# Altium PCB 7000D-5ch.PcbDoc
Units mm, origin at the board's own origin, x right, y up, seen from the top; angles counter-clockwise.
Board outline 69.85 x 45.21 mm, 4 copper layers (Top Layer, GND, PWR, Bottom Layer), stack 0.603 mm thick; 56 components, 42 nets, 190 pads, 92 vias.
Unrouted connection lines stored in the file: 86.
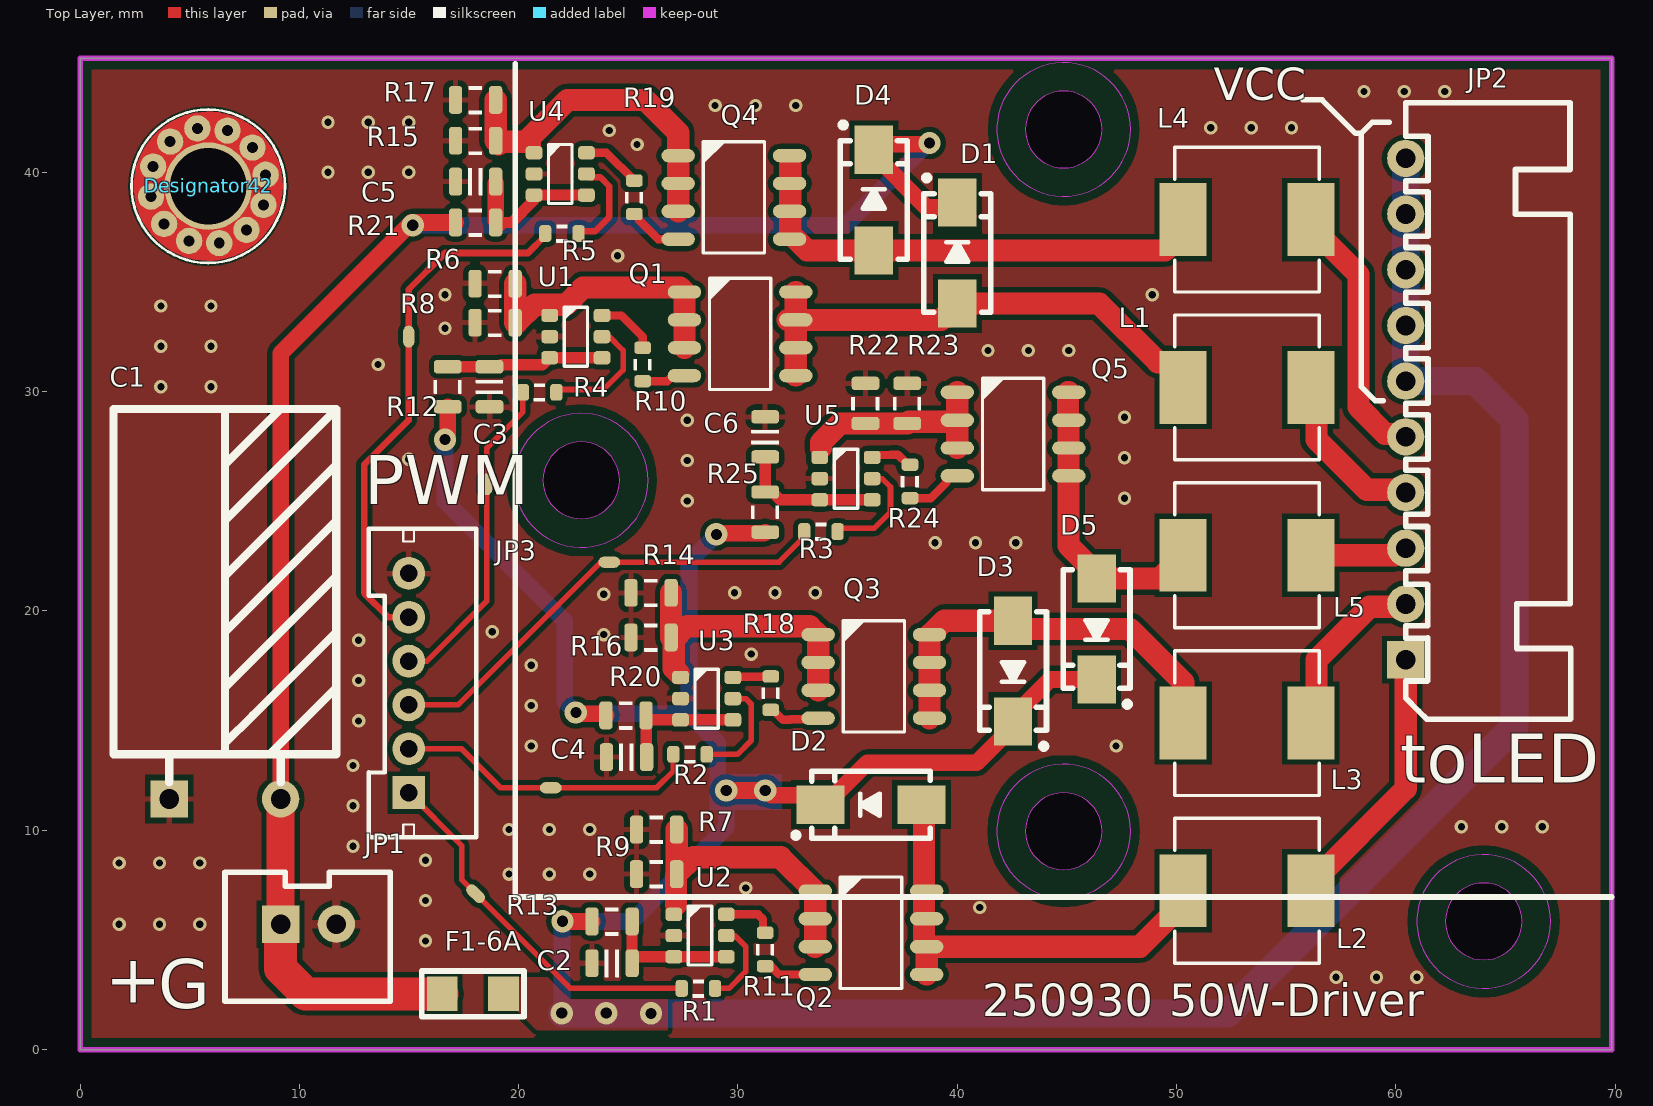
[diagram p0: Top Layer view]
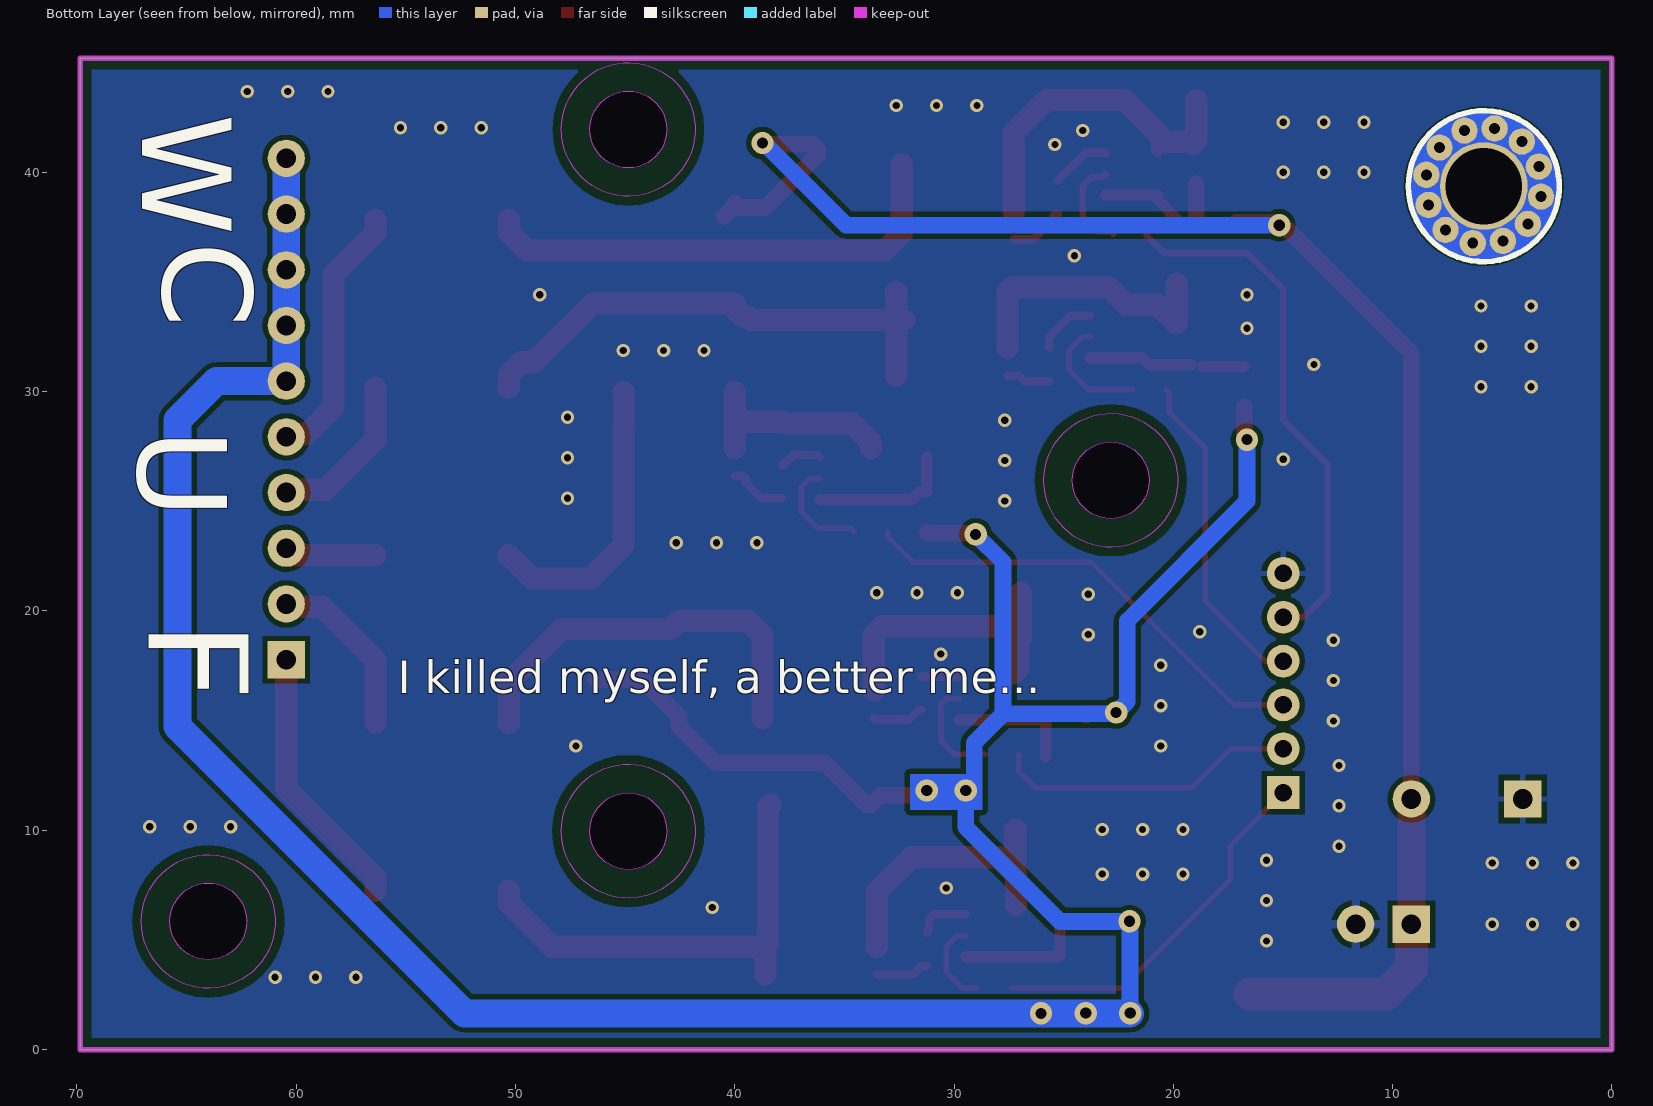
[diagram p1: Bottom Layer view, seen from below]
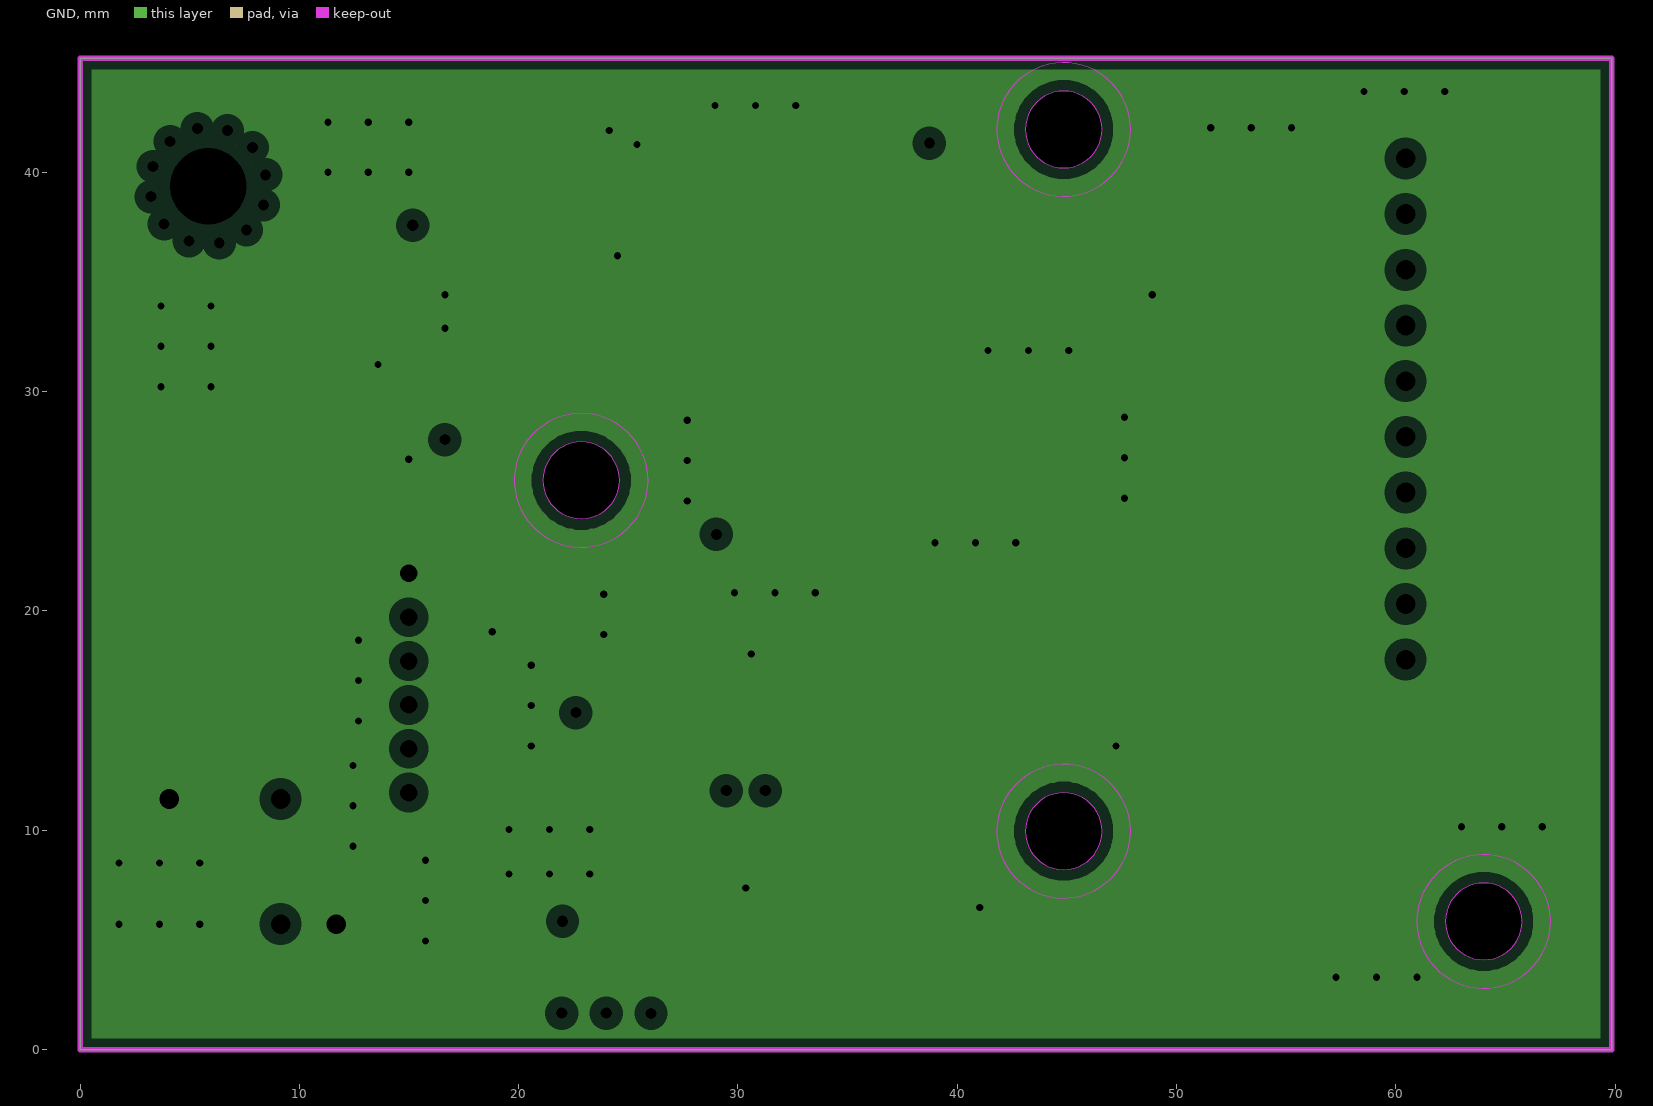
[diagram p2: GND, clearances drawn from the general rule]
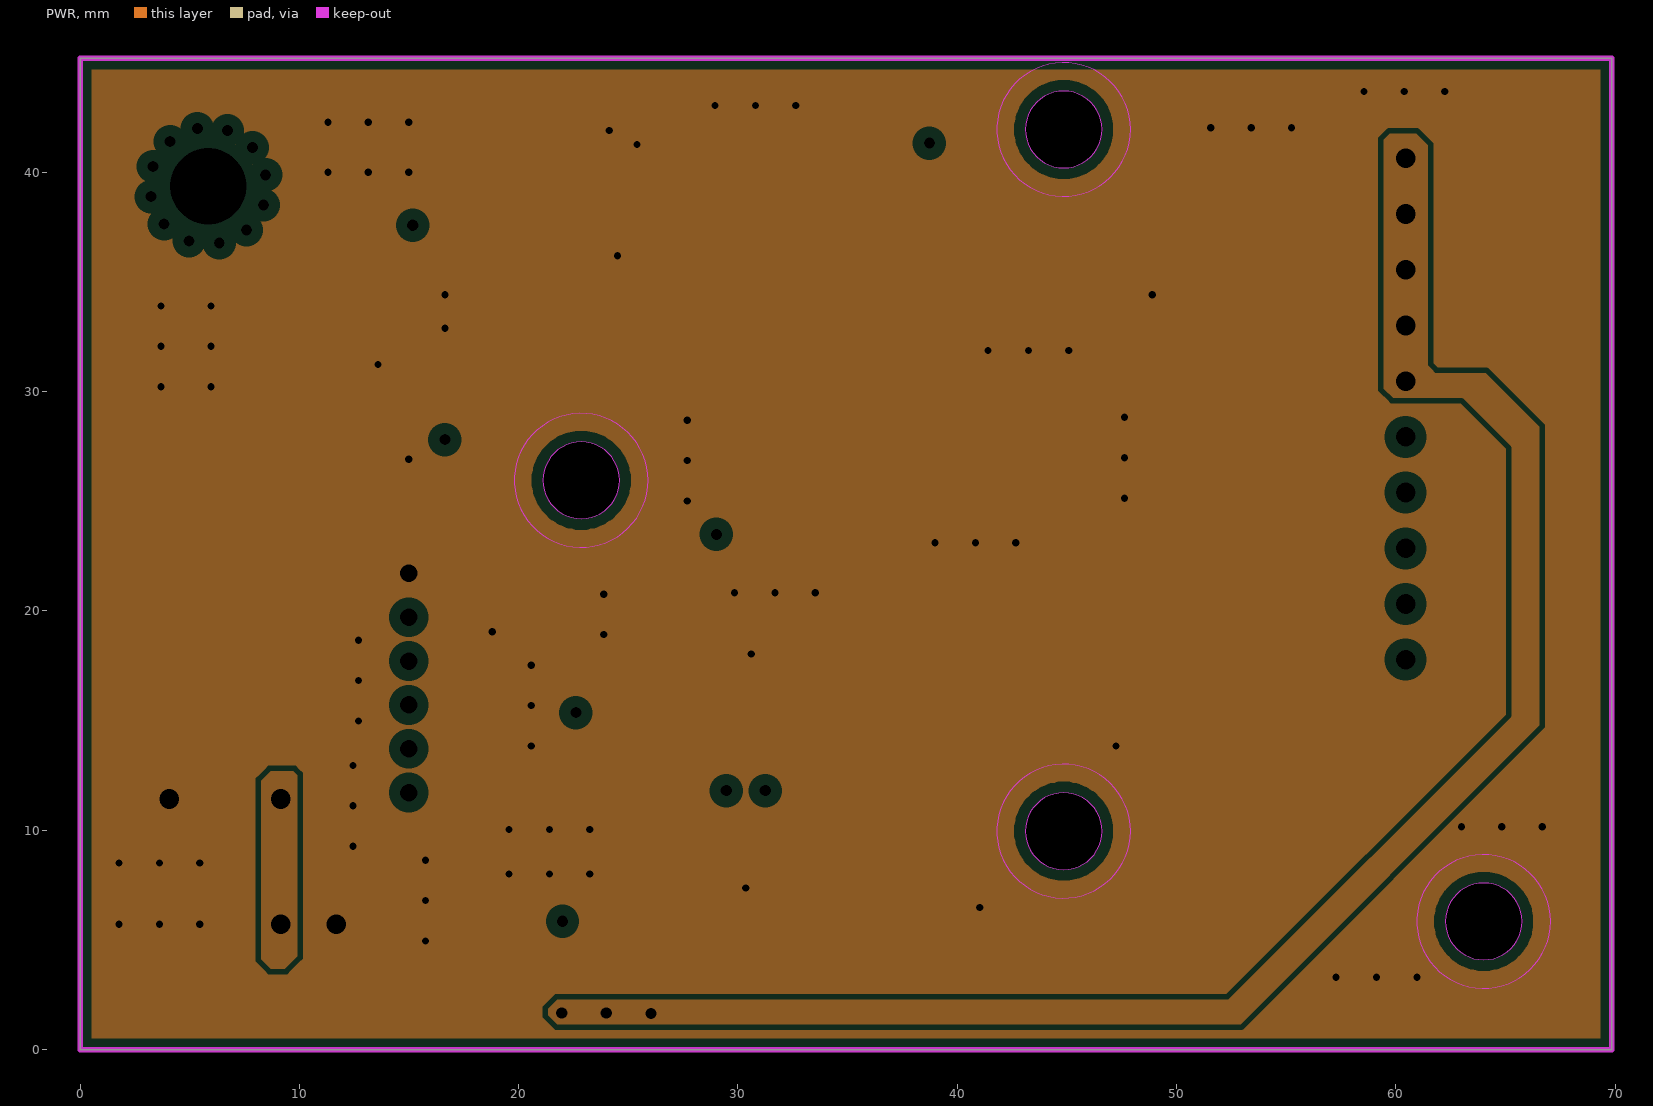
[diagram p3: PWR, clearances drawn from the general rule]
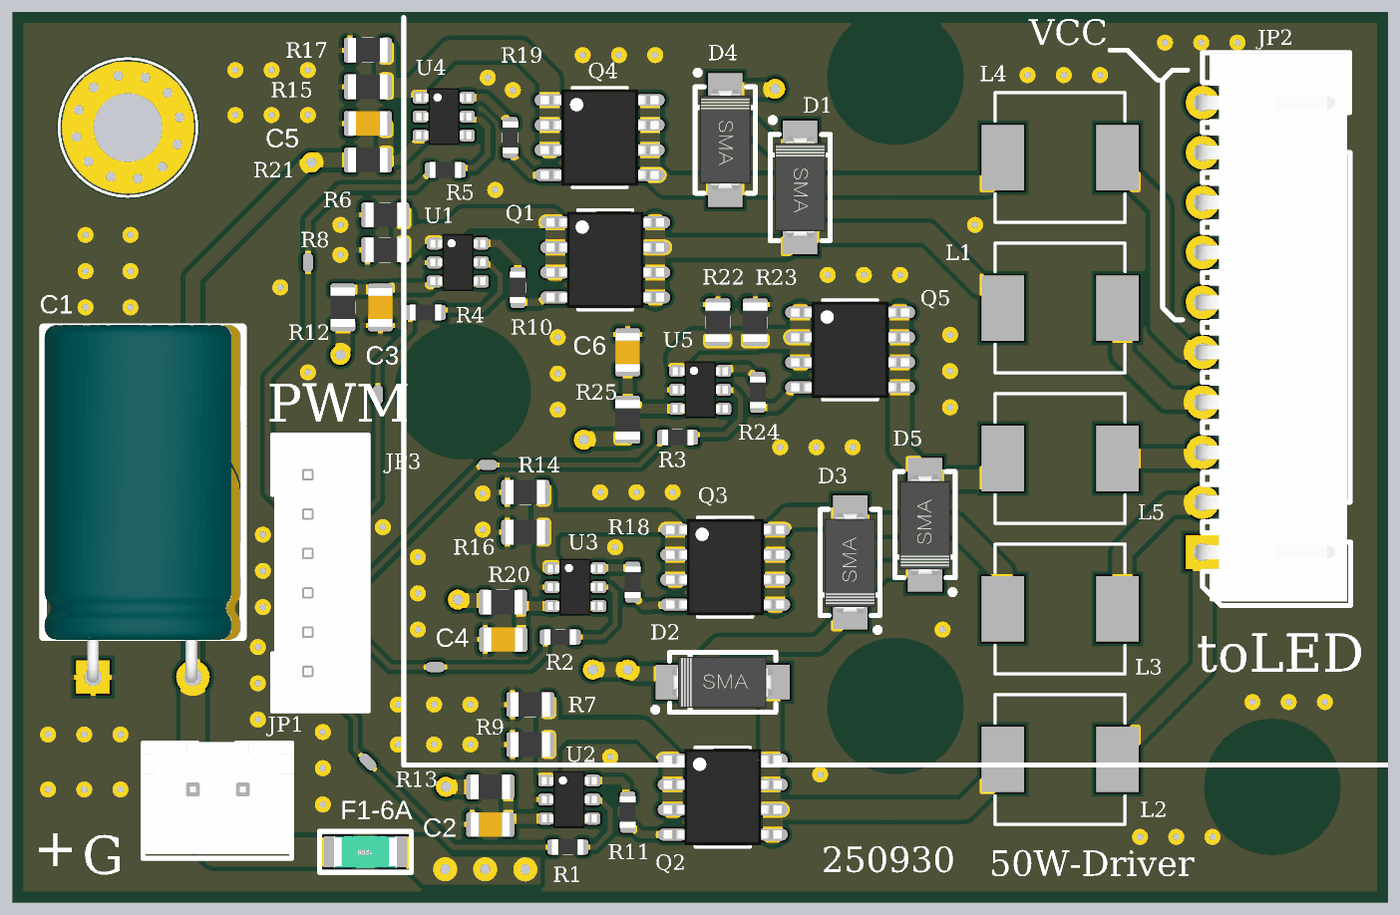
[diagram p4: 3D render of the assembled board from above, using the file's embedded part models]

## Layer stack, top to bottom
Top Solder: solder mask 0.0102, Solder Resist, Dk 3.5
Top Layer: signal copper 0.0356
Dielectric 2: prepreg 0.0711, PP-006, Dk 4.1
GND: plane copper 0.035, net GND
Dielectric 1: dielectric 0.32, FR-4, Dk 4.8
PWR: plane copper 0.035, net (Multiple Nets)
Dielectric 3: prepreg 0.0711, PP-006, Dk 4.1
Bottom Layer: signal copper 0.0356
Bottom Solder: solder mask 0.0102, Solder Resist, Dk 3.5

## Board outline
0,0 69.853,0 69.853,44.958 69.853,45.212 0,45.212
cut-out: 62.258,5.842 ccw(c64.008,5.842) 64.008,4.092 ccw(c64.008,5.842) 65.758,5.842 ccw(c64.008,5.842) 64.008,7.592 ccw(c64.008,5.842)
cut-out: 21.103,25.958 ccw(c22.853,25.958) 22.853,24.208 ccw(c22.853,25.958) 24.603,25.958 ccw(c22.853,25.958) 22.853,27.708 ccw(c22.853,25.958)
cut-out: 43.103,9.958 ccw(c44.853,9.958) 44.853,8.208 ccw(c44.853,9.958) 46.603,9.958 ccw(c44.853,9.958) 44.853,11.708 ccw(c44.853,9.958)
cut-out: 43.103,41.958 ccw(c44.853,41.958) 44.853,40.208 ccw(c44.853,41.958) 46.603,41.958 ccw(c44.853,41.958) 44.853,43.708 ccw(c44.853,41.958)

## Design rules (kind name [scope] priority, off if disabled: settings)
Clearance keepout [OnLayer('Keep-Out Layer')] p1: gap=0.4 ignorepadtopadclearanceinfootprint=TRUE
Clearance Copper [InPoly] p2: gap=0.229 ignorepadtopadclearanceinfootprint=TRUE
Clearance [All] p3: gap=0.178 ignorepadtopadclearanceinfootprint=TRUE
DiffPairsRouting [All] p1: maxlimit=0.381 minlimit=0.152 mostfreqgap=0.254 toplayer_minwidth=0.152 toplayer_maxwidth=0.381 toplayer_prefwidth=0.229 bottomlayer_minwidth=0.152 bottomlayer_maxwidth=0.381 bottomlayer_prefwidth=0.229 maxuncoupledlength=12.7
PlaneClearance [All] p1: clearance=0.508
PlaneConnect [All] p1: planeconnectstyle=Direct reliefexpansion=0.508 reliefentries=4 reliefconductorwidth=0.254 reliefairgap=0.254
PolygonConnect PolygonConnect-GND [InNetClass('GND')] p1: thpad.connectstyle=Relief thpad.reliefconductorwidth=0.254 thpad.reliefentries=4 thpad.polygonreliefangle="90 Angle" thpad.airgapwidth=0.254 smdpad.connectstyle=Relief smdpad.reliefconductorwidth=0.254 smdpad.reliefentries=4 smdpad.polygonreliefangle="90 Angle" smdpad.airgapwidth=0.254 via.connectstyle=Direct via.reliefconductorwidth=0.254 via.reliefentries=4 via.polygonreliefangle="90 Angle" via.airgapwidth=0.254
RoutingVias [All] p1: holewidth=0.305 width=0.584 viastyle="Through Hole" minholewidth=0.254 minwidth=0.508 maxholewidth=0.711 maxwidth=1.27
SolderMaskExpansion [All] p1: expansion=0.102
Width [All] p1: maxlimit=2 minlimit=0.203 preferedwidth=0.254 minimp=50.000000 maximp=50.000000 favimp=50.000000
27 further rules are at their usual default settings.

## Classes and differential pairs
net class GND: GND

## Components (designator, comment, footprint, x,y, rotation, side; value= is the part's Value field where it differs from the comment)
C1 "C0805" "CAP 5.0*10*16-H - GD" 6.604,11.43 r0 top value=470uF
C2 "C0805" CAP_0805 24.257,3.937 r0 top value=1uF
C3 "C0805" CAP_0805 18.669,30.226 r90 top value=1uF
C4 "C0805" CAP_0805 24.917,13.335 r0 top value=1uF
C5 "C0805" CAP_0805 18.034,39.582 r0 top value=1uF
C6 "C0805" CAP_0805 31.242,27.94 r270 top value=1uF
D1 "SS34" SMA 40.005,36.322 r90 top
D2 "SS34" SMA 36.068,11.168 r180 top
D3 "SS34" SMA 42.545,17.258 r270 top
D4 "SS34" SMA 36.195,38.735 r90 top
D5 "SS34" SMA 46.355,19.177 r270 top
Designator42 "Comment" Ground 5.842,39.37 r90 top
F1-6A "Comment" "R 1206-HP_L" 17.907,2.54 r180 top
JP1 "HDR-1X2" XH2.54-LI-2P 10.414,5.715 r0 top
JP2 "HDR-1X10" XH2.54-WI-10P 60.452,29.21 r90 top
JP3 "HDR-1X6" PH2.0-LI-6P 14.986,16.716 r90 top
L1 "H1008" L_IND-SMD_L7.1-W6.6 53.213,30.194 r0 top value=100uH
L2 "H1008" L_IND-SMD_L7.1-W6.6 53.213,7.239 r0 top value=100uH
L3 "H1008" L_IND-SMD_L7.1-W6.6 53.213,14.891 r0 top value=100uH
L4 "H1008" L_IND-SMD_L7.1-W6.6 53.213,37.846 r0 top value=100uH
L5 "H1008" L_IND-SMD_L7.1-W6.6 53.213,22.543 r0 top value=100uH
Q1 "AO4468" SOP_E150_8 30.099,32.639 r0 top
Q2 "AO4468" SOP_E150_8 36.068,5.326 r0 top
Q3 "AO4468" SOP_E150_8 36.195,17.018 r0 top
Q4 "AO4468" SOP_E150_8 29.814,38.862 r0 top
Q5 "AO4468" SOP_E150_8 42.545,28.067 r0 top
R1 "R0603" RES_0603 28.194,2.786 r180 top value=220Ω
R2 "R0603" RES_0603 27.813,13.462 r180 top value=220Ω
R3 "R0603" RES_0603 33.782,23.622 r180 top value=220Ω
R4 "R0603" RES_0603 20.955,29.972 r180 top value=220Ω
R5 "R0603" RES_0603 21.971,37.211 r180 top value=220Ω
R6 "R0805" RES_0805 18.923,34.925 r0 top value=0.5ohm
R7 "R0805" RES_0805 26.289,10.033 r0 top value=0.5ohm
R8 "R0805" RES_0805 18.923,33.147 r0 top value=0.5ohm
R9 "R0805" RES_0805 26.289,8.001 r0 top value=0.5ohm
R10 "R0603" RES_0603 25.654,31.242 r270 top value=100ohm
R11 "R0603" RES_0603 31.242,4.564 r270 top value=100ohm
R12 "R0805" RES_0805 16.764,30.226 r90 top value=3K±500ohm
R13 "R0805" RES_0805 24.257,5.842 r0 top value=3K±500ohm
R14 "R0805" RES_0805 26.035,20.828 r0 top value=0.5ohm
R15 "R0805" RES_0805 18.034,41.444 r0 top value=0.5ohm
R16 "R0805" RES_0805 26.035,18.796 r0 top value=0.5ohm
R17 "R0805" RES_0805 18.034,43.307 r0 top value=0.5ohm
R18 "R0603" RES_0603 31.496,16.256 r270 top value=100ohm
R19 "R0603" RES_0603 25.273,38.862 r270 top value=100ohm
R20 "R0805" RES_0805 24.892,15.24 r0 top value=3K±500ohm
R21 "R0805" RES_0805 18.034,37.719 r0 top value=3K±500ohm
R22 "R0805" RES_0805 35.814,29.464 r270 top value=0.5ohm
R23 "R0805" RES_0805 37.719,29.464 r270 top value=0.5ohm
R24 "R0603" RES_0603 37.846,25.908 r270 top value=100ohm
R25 "R0805" RES_0805 31.242,24.511 r90 top value=3K±500ohm
U1 "Hi7000D" SOT23-6 22.606,32.512 r0 top
U2 "Hi7000D" SOT23-6 28.27,5.199 r0 top
U3 "Hi7000D" SOT23-6 28.575,16.002 r0 top
U4 "Hi7000D" SOT23-6 21.895,39.929 r0 top
U5 "Hi7000D" SOT23-6 34.925,26.035 r0 top

## Footprints (in the part's own frame and the unit in brackets; to place one, negate y for a bottom-side part, rotate by r counter-clockwise, add the part's x,y. Pads: shape width x height; smd on the part's side, far side on the other; paste and mask are expansions set on the pad)
"CAP 5.0*10*16-H - GD" [mm] "脚距5mm直径10mm高度16mm"
  rect 1.7x1.7 hole 0.9: 1(-2.54,0)
  round 1.7 hole 0.9: 2(2.54,0)
  silkscreen extent -5.08,0.76 5.08,17.78, body extent -5.04,-0.3 4.97,17.91, height 10.03
CAP_0805 [mil]
  rrect50% 24x50 smd: 1(-36,0) 2(36,0)
  silkscreen extent -12,-24 12,24, body extent -39,-25 39,25, height 39
Ground [mm]
  round 1.2 hole 0.5: 1(-2.592,-0.503) 1(-2.492,0.871) 1(-1.992,-1.744) 1(-1.717,2.011) 1(-0.853,-2.518) 1(-0.477,2.611) 1(0.522,-2.619) 1(0.897,2.51) 1(1.762,-2.019) 1(2.037,1.736) 1(2.536,-0.879) 1(2.637,0.495)
  round 4 hole 3.5: 1(0,0)
  Top Layer circle w1.8: c0,0 r2.5
  Bottom Layer circle w1.8: c0,0 r2.5
  Bottom Layer lines w0.6: 2.5,0 2.903,0
  silkscreen extent -3.5,-3.5 3.5,3.5
L_IND-SMD_L7.1-W6.6 [mm]
  rect 2.15x3.32 smd: 1(-2.913,0) 2(2.913,0)
  silkscreen extent -3.3,-3.3 3.3,3.3
PH2.0-LI-6P [mm] "长：13.9mm，宽：4.7mm，高：6mm"
  rect 1.5x1.5 hole 0.8: 1(-5,0)
  round 1.5 hole 0.8: 2(-3,0) 3(-1,0) 4(1,0) 5(3,0) 6(5,0)
  silkscreen extent -7.03,-3.08 7.03,1.82, body extent -6.95,-3 6.95,1.7, height 6.01
"R 1206-HP_L" [mil] "1/4W高精度贴片电阻"
  rect 55x62 smd: 1(55.11,0) 2(-55.12,0)
  silkscreen extent -92,-41 92,41, body extent -63,-31 63,32, height 22
RES_0603 [mil]
  rrect50% 22x30 smd: 1(-30,0) 2(30,0)
  silkscreen extent -10,-16 10,16, body extent -31,-16 31,16, height 18
RES_0805 [mil]
  rrect50% 24x50 smd: 1(-36,0) 2(36,0)
  silkscreen extent -12,-24 12,24, body extent -39,-25 39,25, height 24
SMA [mm] "4.5x2.6*2.2mm（长宽高，不包括引脚）"
  rect 2.2x1.75 smd: 1(-2.3,0) 2(2.3,0)
  silkscreen extent -2.7,-1.52 3.56,1.52, body extent -2.53,-1.3 2.58,1.3, height 2.15
SOP_E150_8 [mil]
  oval 60x24 smd: 1(-100,75) 2(-100,25) 3(-100,-25) 4(-100,-75) 5(100,-75) 6(100,-25) 7(100,25) 8(100,75)
  silkscreen extent -55,-100 55,100, body extent -118,-96 118,96, height 69
SOT23-6 [mil]
  rrect50% 30x24 smd: 1(-47,38) 2(-47,0) 3(-47,-38) 4(47,-38) 5(47,0) 6(47,38)
  silkscreen extent -21,-53 21,53, body extent -55,-57 55,57, height 57
XH2.54-LI-2P [mm] "接插件，2P"
  rect 1.7x1.7 hole 0.9: 1(-1.27,0)
  round 1.7 hole 0.9: 2(1.27,0)
  silkscreen extent -3.81,-3.51 3.74,2.37, body extent -3.77,-3.3 3.77,2.4, height 7.05
XH2.54-WI-10P [mm] "接插件，10P"
  rect 1.7x1.7 hole 0.9: 1(-11.43,0)
  round 1.7 hole 0.9: 2(-8.89,0) 3(-6.35,0) 4(-3.81,0) 5(-1.27,0) 6(1.27,0) 7(3.81,0) 8(6.35,0) 9(8.89,0) 10(11.43,0)
  silkscreen extent -14.15,-7.53 13.97,0, body extent -13.93,-7.35 13.93,0.35, height 5.73

## Part data
C1 C2 C3 C4 C5 C6: library part Cap_0805, "Capacitor", Note=±10%, Specification="X7R, ±10%, 16V", Type=0805
D1 D2 D3 D4 D5: "肖特基二极管"
JP1: library part "Header 2", "2P接插件", BOM名称=2P, 学习资源=www.oooc
JP2: library part "Header 10", "10P接插件", BOM名称=10P, 学习资源=www.oooc
JP3: library part "Header 6", "6P接插件", BOM名称=6P, 学习资源=www.oooc
L1 L2 L3 L4 L5: library part Ind_1008, "Inductor", Note=±5%, Specification="High frequency chip inductor ±5%", Type=1008
Q1 Q2 Q3 Q4 Q5: library part AO4468_C5183837, Continuous Drain Current (Id)=10A, Drain Source On Resistance (RDS(on)@Vgs,Id)=20mΩ@4.5V,8A, Drain Source Voltage (Vdss)=30V, Gate Threshold Voltage (Vgs(th)@Id)=1V@250uA, Input Capacitance (Ciss@Vds)=770pF@25V, JLCPCB Part Class="Extended Part", LCSC Part Name="1个N沟道 耐压:3", Manufacturer=JSMSEMI(杰盛, Operating Temperature=-55℃~+150?, Power Dissipation (Pd)=1.8W, Reverse Transfer Capacitance (Crss@Vds)=90pF, Add into BOM=yes, Convert to PCB=yes, Datasheet=https://atta.szlcsc.com/upload/public/pdf/source/20240105/02C4B597700191549CF21A6FC2767502.pdf, Device=AO4468_C5183837, Manufacturer Part=AO4468, Supplier=LCSC, Supplier Footprint=SOP-8, Supplier Part=C5183837, Symbol=AO4468_C5183837, Total Gate Charge (Qg@Vgs)=11.6nC@15V, Type=1¸öN¹
R1 R2 R3 R4 R5 R10 R11 R18 R19 R24: library part Res_0603, "Resistor", Note=±1%, Specification=±1%, Type=0603
R6 R7 R8 R9 R12 R13 R14 R15 R16 R17 R20 R21 R22 R23 R25: library part Res_0805, "Resistor", Note=±1%, Specification=±1%, Type=0805
U1 U2 U3 U4 U5: Frequency - Switching=1MHz, JLCPCB Part Class="Extended Part", LCSC Part Name=多功能平均, Manufacturer=Hichips(ÖÇÐ, Operating Temperature=-40℃~+125?, Output Current=5A, Output Voltage=-, Add into BOM=yes, Convert to PCB=yes, Datasheet=https://item.szlcsc.com/datasheet/Hi7000D/2981192.html, Device=Hi7000D, Dimming=PWM£»Ä, Manufacturer Part=Hi7000D, Number of Channels=1, Supplier=LCSC, Supplier Footprint=SOT-23-6, Supplier Part=C2830172, Symbol=HI7000D, Topology=-, Voltage - Input(DC)=-

## Free pads (board coordinates)
  oval 0.508x1 smd: 2(14.986,32.512) 5(18.542,25.781)
  oval 1x0.508 smd: 4(24.13,22.225) 5(21.463,11.938)
  oval 0.508x1 smd rot 45: 6(18.034,7.112)

## Via types
v1: diameter 0.61, hole 0.33, Top Layer to Bottom Layer, 81 vias
v2: diameter 1.016, hole 0.508, Top Layer to Bottom Layer, 11 vias

## Nets (pads, with @x,y where several pads share a name; then routed paths per layer and width w, separated by ;. In a path a pad name is that pad's centre, name@x,y a point inside that pad or via, vN(x,y) a via of type N, cw(c..) or ccw(c..) an arc to the next point about the centre after c; other vN are vias at no path point)
Amber-: JP2.4 L1.2 | length 7.4
  Top Layer w1.016: L1.2@56.38,30.194 56.38,27.821 58.67,25.531 60.321,25.531 JP2.4
Blue-: JP2.5 L4.2 | length 12.1
  Top Layer w1.016: L4.2@56.38,37.846 56.38,37.261 58.293,35.348 58.293,29.297 59.519,28.071 60.321,28.071 JP2.5
CS1: Q2.1 Q2.2 Q2.3 R7.2 R9.2 U2.1 | length 13.2
  Top Layer w1.016: 27.178,6.604 27.178,7.976 R9.2 ; R7.2 R9.2 ; Q2.3 Q2.2 33.528,7.18 31.945,8.763 27.965,8.763 R9.2
CS2: Q3.1 Q3.2 Q3.3 R14.2 R16.2 U3.1 | length 13.4
  Top Layer w1.016: R14.2 R16.2 R16.2@27.076,18.669 ; U3.1@27.305,17.145 27.076,17.374 R16.2@27.076,18.669 ; Q3.3 Q3.2 Q3.1 33.274,19.304 27.661,19.304 27.076,18.72 R16.2@27.076,18.669
CS3: Q5.1 Q5.2 Q5.3 R22.2 R23.2 U5.1 | length 9.4
  Top Layer w1.016: 33.782,27.432 33.782,27.686 34.646,28.55 R22.2 R23.2 37.795,28.626 39.929,28.626 Q5.2 ; Q5.3 Q5.2 ; Q5.1 Q5.2
CS4: Q1.1 Q1.2 Q1.3 R6.2 R8.2 U1.1 | length 12.8
  Top Layer w1.016: R6.2 R8.2 19.914,33.147 20.729,33.962 22.151,33.962 22.936,34.747 27.356,34.747 Q1.1 Q1.2 Q1.3
CS5: Q4.1 Q4.2 Q4.3 R15.2 R17.2 U4.1 | length 16.2
  Top Layer w0.4: U4.1 20.723,40.894 20.828,40.999 20.828,41.91
  Top Layer w1.016: R15.2 R17.2 ; R15.2@19.075,41.275 19.202,41.402 20.32,41.402 20.828,41.91 22.225,43.307 25.781,43.307 27.274,41.814 Q4.1 Q4.2 Q4.3
Gate1: Q2.4 R11.2 | length 2.4
  Top Layer w0.381: R11.2 31.496,3.802 31.877,3.421 Q2.4
Gate2: Q3.4 R18.2 | length 2.4
  Top Layer w0.381: R18.2 31.598,15.494 32.055,15.037 32.37,15.037 32.403,15.069 33.611,15.069 Q3.4
Gate3: Q5.4 R24.2 | length 2.7
  Top Layer w0.381: R24.2 38.798,25.146 39.504,25.852 39.504,26.056 39.61,26.162 Q5.4
Gate4: Q4.4 R19.2 | length 2.6
  Top Layer w0.381: R19.2 25.375,38.1 25.463,38.011 25.463,37.844 26.351,36.957 Q4.4
Gate5: Q1.4 R10.2 | length 2
  Top Layer w0.381: R10.2 26.786,30.48 27.04,30.734 Q1.4
GND: C1.1 C2.1 C3.1 C4.1 C5.1 C6.1 JP1.2 JP3.6 R6.1 R7.1 R8.1 R9.1 R14.1 R15.1 R16.1 R17.1 R22.1 R23.1 U1.2 U2.2 U3.2 U4.2 U5.2
  other v1: 57.277,3.302 59.118,3.302 60.96,3.302 15.748,4.953 1.778,5.715 3.619,5.715 5.461,5.715 41.021,6.477 15.748,6.794 30.353,7.366 19.558,8.001 21.399,8.001 23.241,8.001 1.778,8.509 3.619,8.509 5.461,8.509 15.748,8.636 12.446,9.271 19.558,10.033 21.399,10.033 23.241,10.033 62.992,10.16 64.834,10.16 66.675,10.16 12.446,11.112 12.446,12.954 20.574,13.843 47.244,13.843 12.7,14.986 20.574,15.684 12.7,16.828 20.574,17.526 30.607,18.034 12.7,18.669 23.876,18.923 18.796,19.05 23.876,20.764 29.845,20.828 31.686,20.828 33.528,20.828 38.989,23.114 40.831,23.114 42.672,23.114 27.686,25.019 47.625,25.146 27.686,26.86 14.986,26.924 47.625,26.987 27.686,28.702 47.625,28.829 3.683,30.226 5.969,30.226 13.589,31.242 41.402,31.877 43.243,31.877 45.085,31.877 3.683,32.067 5.969,32.067 16.637,32.893 3.683,33.909 5.969,33.909 16.637,34.417 48.895,34.417 24.511,36.195 11.303,40.005 13.144,40.005 14.986,40.005 25.4,41.275 24.13,41.91 51.562,42.037 53.404,42.037 55.245,42.037 11.303,42.291 13.144,42.291 14.986,42.291 28.956,43.053 30.797,43.053 32.639,43.053 58.547,43.688 60.389,43.688 62.23,43.688
Green-: JP2.2 L3.2 | length 8
  Top Layer w1.016: L3.2@56.38,14.891 56.38,17.772 58.797,20.189 60.321,20.189 JP2.2
Mint-: JP2.3 L5.2 | length 4.2
  Top Layer w1.016: L5.2@56.38,22.543 59.949,22.543 60.267,22.86 JP2.3
NetC2_2: C2.2 R13.2 U2.3 U2.4 | length 5.9
  Top Layer w0.508: R13.2 25.171,4.285 25.222,4.234 U2.3 U2.4
NetC3_2: C3.2 R12.2 U1.3 U1.4 | length 6.7
  Top Layer w0.508: R12.2 C3.2 ; C3.2@19.186,31.226 21.091,31.226 U1.3 U1.4
NetC4_2: C4.2 R20.2 U3.3 U3.4 | length 5.9
  Top Layer w0.508: R20.2 25.819,15.227 R20.2@25.819,15.075 ; C4.2 25.819,13.348 R20.2@25.819,15.075 ; U3.4 U3.3 25.857,15.037 R20.2@25.819,15.075
NetC5_2: C5.2 R21.2 U4.3 U4.4 | length 6.6
  Top Layer w0.508: R21.2@19.075,37.668 19.126,37.719 19.685,37.719 20.701,38.735 U4.3 U4.4
  Top Layer w0.762: C5.2@18.948,39.497 18.948,37.795 R21.2@19.075,37.668
NetC6_2: C6.2 R25.2 U5.3 U5.4 | length 6.6
  Top Layer w0.508: C6.2 R25.2 31.572,25.425 31.928,25.07 U5.3 U5.4
NetD1_1: D1.1 L1.1 Q1.5 Q1.6 Q1.7 Q1.8 | length 24.2
  Top Layer w1.016: Q1.7@32.258,33.274 39.257,33.274 39.413,33.43 39.638,33.43 40.005,33.797 D1.1 46.472,34.022 49.148,31.346 49.733,31.346 50.3,30.779 L1.1 ; Q1.5 Q1.6 Q1.7 Q1.8
NetD2_1: D2.1 L2.1 Q2.5 Q2.6 Q2.7 Q2.8 | length 20.9
  Top Layer w1.016: D2.1 38.488,11.048 38.488,4.811 Q2.6 ; Q2.5 Q2.6 ; L2.1 50.3,6.654 48.337,4.691 Q2.6
NetD3_1: D3.1 L3.1 Q3.5 Q3.6 Q3.7 Q3.8 | length 18.7
  Top Layer w1.016: Q3.5 Q3.6 Q3.7 Q3.8 38.786,18.923 39.421,19.558 D3.1 42.926,19.177 47.879,19.177 50.3,16.756 L3.1
NetD4_1: D4.1 L4.1 Q4.5 Q4.6 Q4.7 Q4.8 | length 22.3
  Top Layer w1.016: 32.385,40.386 32.385,37.211 33.161,36.435 D4.1 49.474,36.435 50.3,37.261 L4.1
NetD5_1: D5.1 L5.1 Q5.5 Q5.6 Q5.7 Q5.8 | length 13.3
  Top Layer w1.016: Q5.8 45.048,29.972 45.048,28.499 45.07,28.477 45.07,22.987 46.58,21.477 49.235,21.477 L5.1
NetJP3_1: JP3.1 pad.6 R1.2 | length 17
  Top Layer w0.254: JP3.1 17.399,9.303 17.399,7.747 22.36,2.786 R1.2@27.394,2.786
NetJP3_2: JP3.2 pad.5@21.463,11.938 R2.2 | length 13.9
  Top Layer w0.254: JP3.2 17.399,13.716 19.177,11.938 26.289,11.938 27.051,12.7 R2.2 R2.2@27.035,13.446
NetJP3_3: JP3.3 pad.4 R3.2 | length 21.5
  Top Layer w0.254: JP3.3 17.24,15.716 23.749,22.225 31.877,22.225 33.02,23.368 R3.2
NetJP3_4: JP3.4 pad.5@18.542,25.781 R4.2 | length 15.4
  Top Layer w0.254: JP3.4@14.732,17.526 14.922,17.716 15.811,17.716 18.542,20.447 18.542,27.432 20.193,29.083 R4.2 R4.2@20.32,30.099
NetJP3_5: JP3.5 pad.2 R5.2 | length 24.5
  Top Layer w0.305: JP3.5 14.066,19.716 12.954,20.828 12.954,26.67 14.986,28.702 14.986,34.671 16.637,36.322 20.422,36.322 21.209,37.109 R5.2
NetR10_1: R10.1 U1.6 | length 2.8
  Top Layer w0.381: U1.6 24.689,33.477 25.654,32.512 R10.1
NetR11_1: R11.1 U2.6 | length 2.4
  Top Layer w0.381: U2.6 30.92,6.164 31.143,5.941 31.143,5.415 31.232,5.326 R11.1
NetR18_1: R18.1 U3.6 | length 1.7
  Top Layer w0.381: U3.6 29.794,16.993 31.471,16.993 R18.1
NetR19_1: R19.1 U4.6 | length 2.7
  Top Layer w0.381: U4.6 24.003,40.894 R19.1
NetR24_1: R24.1 U5.6 | length 2
  Top Layer w0.381: U5.6 36.233,27.114 36.959,27.114 36.972,27.127 37.287,27.127 37.744,26.67 R24.1
PWM_Amber: R4.1 U1.5 | length 5.4
  Top Layer w0.254: R4.1@21.844,30.099 23.876,30.099 24.765,30.988 24.765,31.877 24.13,32.512 U1.5
PWM_Blue: R5.1 U4.5 | length 4.4
  Top Layer w0.305: R5.1 22.733,37.313 23.47,37.313 24.13,37.973 24.13,39.37 23.724,39.776 23.241,39.776 U4.5
PWM_Green: R2.1 U3.5 | length 4.9
  Top Layer w0.254: R2.1 29.972,13.462 30.607,14.097 30.607,15.748 30.353,16.002 U3.5
PWM_Mint: R3.1 U5.5 | length 4.9
  Top Layer w0.254: R3.1 34.689,23.767 36.213,23.767 36.957,24.511 36.957,25.654 36.576,26.035 U5.5
PWM_RED: R1.1 U2.5 | length 3.9
  Top Layer w0.254: R1.1@28.994,2.786 29.583,2.786 30.353,3.556 30.353,4.699 29.853,5.199 U2.5
Red-: JP2.1 L2.2 | length 12.2
  Top Layer w1.016: L2.2@56.38,7.239 56.38,7.824 60.452,11.896 JP2.1
VCC: C1.2 D1.2 D2.2 D3.2 D4.2 D5.2 F1-6A.1 F1-6A.2 JP1.1 JP2.6 JP2.7 JP2.8 JP2.9 JP2.10 R12.1 R13.1 R20.1 R21.1 R25.1 | length 233.5
  Top Layer w0.762: C1.2 9.144,31.75 15.113,37.719 R21.1 ; v2(16.637,27.813) 16.637,27.882 16.764,28.009 R12.1 ; v2(21.996,5.85) 22.004,5.842 R13.1 ; v2(22.606,15.367) 22.655,15.318 23.901,15.318 23.978,15.242 R20.1 ; v2(29.014,23.495) 29.063,23.544 31.189,23.544 R25.1 ; v2(29.464,11.811) v2(31.242,11.811) 31.311,11.811 31.525,11.597 33.339,11.597 D2.2 33.993,11.168 35.906,13.081 40.893,13.081 42.545,14.733 D3.2 42.545,15.183 44.239,16.877 D5.2 ; v2(38.73,41.338) 38.681,41.29 36.45,41.29 D4.2 36.195,40.81 38.608,38.397 39.78,38.397 D1.2 40.005,38.467 D1.2@40.499,37.973 ; JP2.10@60.198,40.64 JP2.10
  Top Layer w1.27: JP1.1 C1.2
  Top Layer w1.5: JP1.1 9.144,3.683 10.287,2.54 F1-6A.1
  Bottom Layer w0.762: v2(15.171,37.592) 34.925,37.592 v2@38.672,41.338 ; v2(16.637,27.813) 16.637,25.015 22.098,19.554 22.098,15.875 v2(22.606,15.367) 22.666,15.307 27.765,15.307 ; v2@21.971,1.651 21.971,5.825 v2(21.996,5.85) 22.004,5.842 25.171,5.842 29.464,10.135 v2(29.464,11.811) 29.083,12.192 29.083,13.989 27.765,15.307 ; v2(29.014,23.495) 27.765,22.245 27.765,15.307
  Bottom Layer w1.27: v2@21.971,1.651 52.324,1.651 65.405,14.732 65.405,28.702 63.627,30.48 JP2.6 JP2.7 JP2.8 JP2.9 JP2.10
  other v2: 21.963,1.659 23.995,1.659 26.035,1.651
pads on no net: Designator42.1

## Polygon pours and split planes (outlines as drawn)
GND on Bottom Layer "Bottom Layer-GND" (solid, remove dead copper, pour order 2): 0,45.212 69.853,45.212 69.853,0 0,0
GND on Top Layer "Top Layer-GND" (solid, remove dead copper, pour order 0): 0,45.212 69.853,45.212 69.853,0 0,0
VCC on Top Layer (solid, pour order 4): 18.669,3.302 21.336,3.302 22.352,2.286 26.797,2.286 26.797,0.889 20.828,0.889 19.939,1.778 18.796,1.778 18.669,1.905
GND on GND (split plane): 69.343,0.51 0.51,0.51 0.51,44.702 69.343,44.702
VCC on PWR (split plane): 9.906,12.52 9.906,6.604 9.906,4.244 9.345,3.683 8.689,3.683 8.255,4.117 8.255,12.266 8.689,12.7 9.726,12.7
VCC on PWR (split plane): 61.468,41.222 61.468,31.242 61.477,31.193 61.505,31.152 61.759,30.898 61.8,30.87 61.849,30.861 64.082,30.861 66.548,28.395 66.548,14.785 52.906,1.143 21.77,1.143 21.336,1.577 21.336,1.852 21.77,2.286 52.324,2.286 52.373,2.295 52.414,2.323 65.241,15.15 65.269,15.191 65.278,15.24 65.278,27.432 65.269,27.481 65.26,27.494 65.241,27.522 63.082,29.681 63.041,29.709 62.992,29.718 59.87,29.718 59.436,30.152 59.436,41.476 59.743,41.783 60.907,41.783
GND on PWR (split plane): 69.343,0.51 0.51,0.51 0.51,44.702 69.343,44.702

## Keep-outs
Keep-Out Layer:
  circle w0.025: c22.853,25.958 r3.05
  circle w0.025: c44.853,41.958 r3.05
  circle w0.025: c44.853,9.958 r3.05
  circle w0.025: c64.008,5.842 r3.05
  lines w0.013: 69.853,6.958 69.853,44.958 69.853,6.958
  lines w0.25: 0,0 69.853,0 69.853,44.958 69.853,45.212 0,45.212 0,0

## Other copper
Bottom Layer:
  rectangle net VCC: 28.702,10.922 32.004,12.573
PWR (plane layer: these items are gaps in the copper):
  lines w0.25: 10.033,4.191 9.398,3.556 8.636,3.556 8.128,4.064 8.128,12.319 8.636,12.827 9.779,12.827 10.033,12.573 10.033,6.604 10.033,4.244 ; 21.209,1.524 21.209,1.905 21.717,2.413 52.324,2.413 65.151,15.24 65.151,27.432 62.992,29.591 59.817,29.591 59.309,30.099 59.309,41.529 59.69,41.91 60.96,41.91 61.595,41.275 61.595,31.242 61.849,30.988 64.135,30.988 66.675,28.448 66.675,14.732 52.959,1.016 21.717,1.016 21.209,1.524

## Silkscreen, mask and mechanical layers (free items; w line width, h text height)
Top Overlay:
  lines w0.25: 55.753,43.307 56.642,43.307 58.166,41.783 58.42,41.783 ; 59.436,29.591 59.055,29.591 58.42,30.226 58.42,41.783 ; 59.69,42.291 58.928,42.291 58.42,41.783
  lines w0.254: 19.853,44.958 19.853,6.958 69.853,6.958
  text "VCC" at 51.689,42.799 h2.54
  text "PWM" at 12.954,24.13 h3.81
  text "toLED" at 60.198,11.43 h3.81
  text "+" at 1.143,1.397 h3.81
  text "G" at 3.556,1.143 h3.81
  text "250930" at 41.148,1.016 h2.54
  text "50W-Driver" at 49.657,1.016 h2.54
Bottom Overlay:
  text "W" at 68.364,42.672 h7 r90
  text "C" at 67.437,36.83 h7 r90
  text "U" at 68.58,28.321 h7 r90
  text "F" at 68.218,19.558 h8 r90
  text "I killed myself, a better me..." at 55.372,15.748 h2.54
Mechanical 1:
  circle w0.025: c64.008,5.842 r1.75
  circle w0.013: c22.853,25.958 r1.75
  circle w0.013: c44.853,9.958 r1.75
  circle w0.013: c44.853,41.958 r1.75
  lines w0.013: 69.853,6.958 69.853,44.958 69.853,6.958
  lines w0.25: 0,0 0,45.212 69.853,45.212 69.853,44.958 69.853,0 0,0